# Altium PCB BD658T_AMP_ES4_220615_F.PcbDoc (part 4 of 4)
Units mm, origin at the board's own origin, x right, y up, seen from the top; angles counter-clockwise.
Board outline 153 x 112 mm, 4 copper layers (TOP, LAYER2, LAYER3, BOTTOM), stack 1.59 mm thick; 286 components, 184 nets, 896 pads, 614 vias.
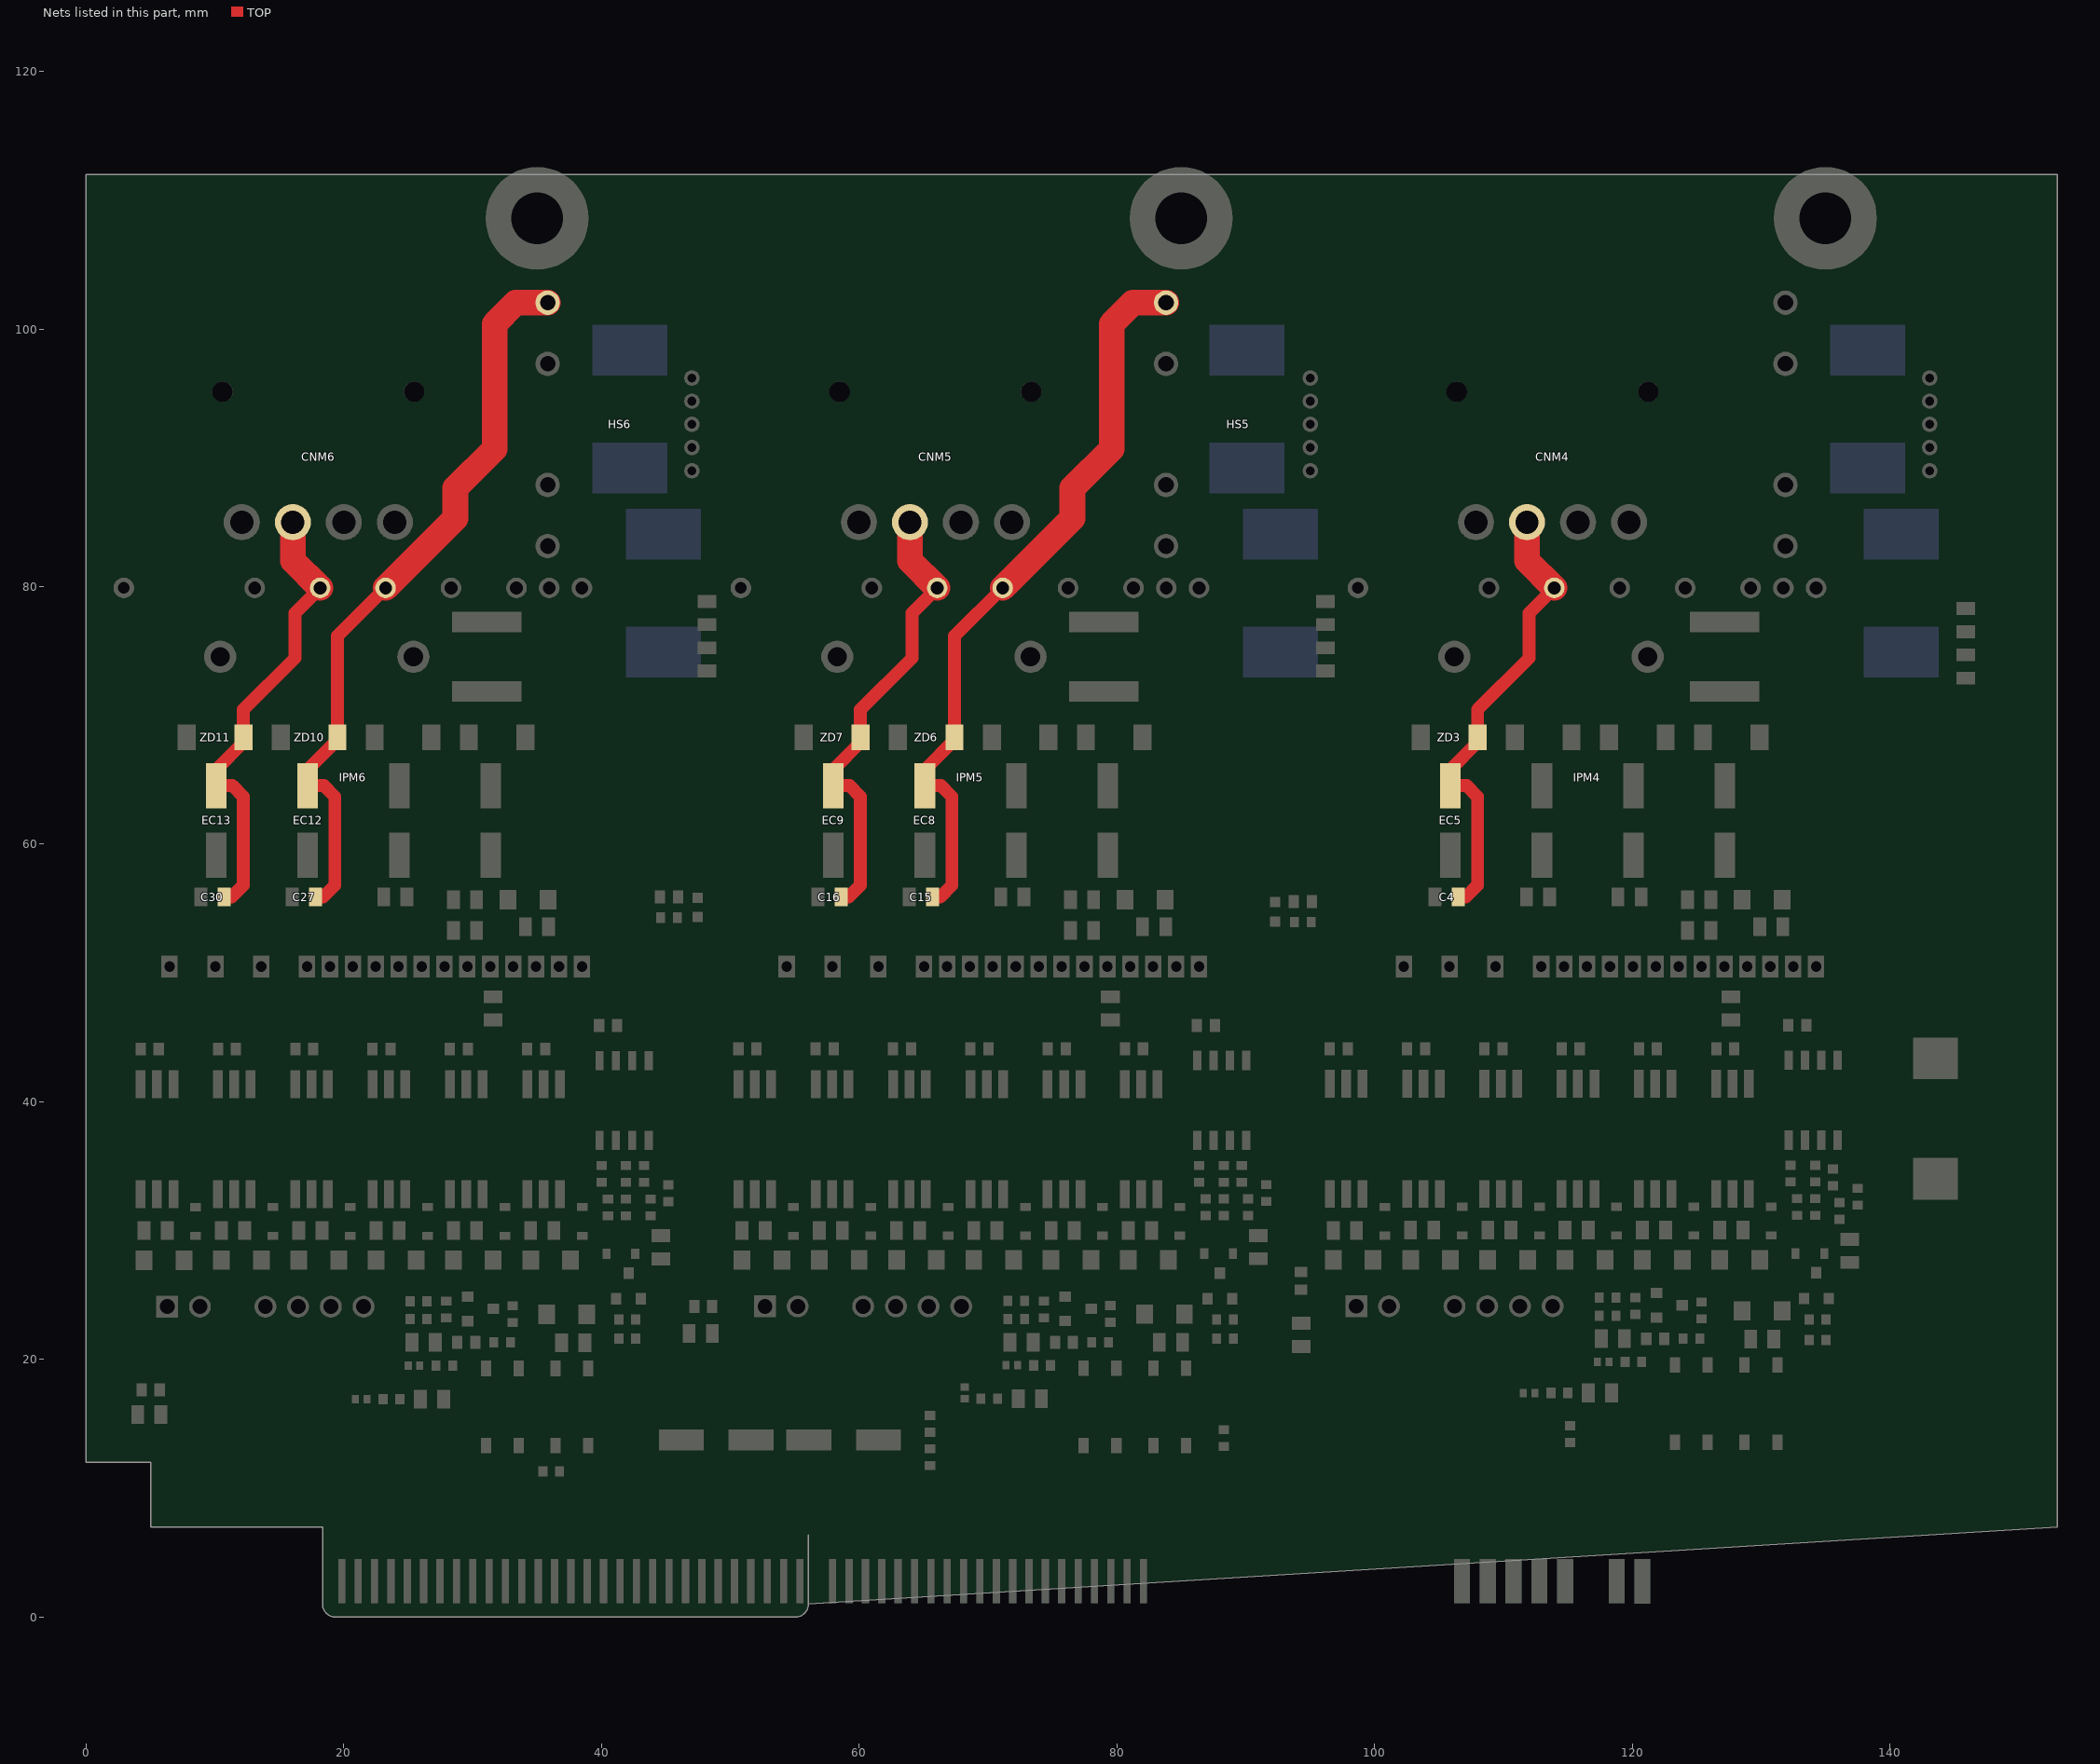
[diagram p6: the nets of this part, all layers, seen from the top]

## Via types
v1: diameter 0.6, hole 0.3, TOP to BOTTOM, 546 vias
v2: diameter 0.4, hole 0.4, TOP to BOTTOM, 56 vias
v3: diameter 6.5, hole 6.5, TOP to BOTTOM, 6 vias
v4: diameter 0.1/0.1/0.1/0.1 (per signal layer), hole 4, TOP to BOTTOM, 4 vias
v5: diameter 4, hole 4, TOP to BOTTOM, 2 vias

## Nets (pads, with @x,y where several pads share a name; then routed paths per layer and width w, separated by ;. In a path a pad name is that pad's centre, name@x,y a point inside that pad or via, vN(x,y) a via of type N, cw(c..) or ccw(c..) an arc to the next point about the centre after c; other vN are vias at no path point) (continued)
VOUT_5: C15.2 EC8.2 HS5.9 IPM5.22 ZD6.2 | length 58
  TOP w1: C15.2@65.7,55.9 66.3,55.9 67.2,56.8 67.2,63.7 66.35,64.55 EC8.2@65.1,64.55 65.1,65.8 67.4,68.1 ZD6.2@67.4,68.3 67.4,76.16 IPM5.22@71.14,79.9
  TOP w2: IPM5.22@71.14,79.9 76.55,85.31 76.55,87.65 79.6,90.7 79.6,100.4 81.25,102.05 HS5.9@83.82,102.05
VOUT_6: C27.2 EC12.2 HS6.9 IPM6.22 ZD10.2 | length 57.9
  TOP w1: C27.2@17.8,55.9 18.4,55.9 19.3,56.8 19.3,63.7 18.45,64.55 EC12.2@17.2,64.55 17.2,65.8 19.5,68.1 ZD10.2@19.5,68.3 19.5,76.16 IPM6.22@23.24,79.9
  TOP w2: IPM6.22@23.24,79.9 28.65,85.31 28.65,87.65 31.7,90.7 31.7,100.4 33.35,102.05 HS6.9@35.82,102.05
W_4: C4.2 CNM4.3 EC5.2 IPM4.23 ZD3.2 | length 35.9
  TOP w1: C4.2@106.5,55.9 107.1,55.9 108,56.8 108,63.7 107.15,64.55 EC5.2@105.9,64.55 105.9,65.8 108,67.9 ZD3.2@108,68.3 108,70.45 112,74.45 112,77.94 IPM4.23@113.96,79.9
  TOP w2: CNM4.3@111.84,85 111.84,82.02 IPM4.23@113.96,79.9
W_5: C16.2 CNM5.3 EC9.2 IPM5.23 ZD7.2 | length 35.9
  TOP w1: C16.2@58.6,55.9 59.2,55.9 60.1,56.8 60.1,63.7 59.25,64.55 EC9.2@58,64.55 58,65.8 60.1,67.9 ZD7.2@60.1,68.3 60.1,70.45 64.1,74.45 64.1,77.94 IPM5.23@66.06,79.9
  TOP w2: CNM5.3@63.94,85 63.94,82.02 IPM5.23@66.06,79.9
W_6: C30.2 CNM6.3 EC13.2 IPM6.23 ZD11.2 | length 35.9
  TOP w1: C30.2@10.7,55.9 11.3,55.9 12.2,56.8 12.2,63.7 11.35,64.55 EC13.2@10.1,64.55 10.1,65.8 12.2,67.9 ZD11.2@12.2,68.3 12.2,70.45 16.2,74.45 16.2,77.94 IPM6.23@18.16,79.9
  TOP w2: CNM6.3@16.04,85 16.04,82.02 IPM6.23@18.16,79.9
pads on no net: CNM4. CNM5. CNM6. CNPN3.09 CNPN3.10 CNPWM4.81 CNPWM4.82 CNPWM4.83 CNPWM4.84 CNPWM4.85 CNPWM4.86 CNPWM4.87 CNPWM4.88 CNPWM4.89 CNPWM4.91 IPM4. IPM4.9 IPM5. IPM5.9 IPM6. IPM6.9 PC1.2 PC2.2 PC4.2 PC5.2 PC6.2 PC7.2 PC10.2 PC11.2 PC13.2 PC14.2 PC15.2 PC16.2 PC19.2 PC20.2 PC22.2 PC23.2 PC24.2 PC25.2
copper on no net:
  other v2: 6.496,7 7.396,7 8.296,7 9.196,7 10.096,7 10.996,7 11.896,7 91.046,7 91.946,7 92.846,7 93.746,7 94.646,7 95.546,7 96.446,7 126.068,7 126.968,7 127.868,7 128.768,7 129.668,7 130.568,7 131.468,7 144.324,7 145.224,7 146.124,7 147.024,7 147.924,7 148.824,7 149.724,7 3.65,112 4.55,112 5.45,112 6.35,112 7.25,112 8.15,112 9.05,112 54.15,112 55.05,112 55.95,112 56.85,112 57.75,112 58.65,112 59.55,112 113.15,112 114.05,112 114.95,112 115.85,112 116.75,112 117.65,112 118.55,112 146.15,112 147.05,112 147.95,112 148.85,112 149.75,112 150.65,112 151.55,112
  other v3: 2.7,65.2 38.7,65.2 50.6,65.2 86.6,65.2 98.5,65.2 134.5,65.2
  other v4: 5,-5 148,-5 5,119 148,119
  other v5: 12.5,13.8 103,13.8

## Polygon pours and split planes (outlines as drawn)
AMP_P15_A4 on TOP "TOP-AMP_P15_A4" (solid, pour order 7): 96.3,25 99.3,25 99.4,24.9 99.4,22.6 99.1,22.3 93.4,22.3 93.1,22.3 92.9,22.5 92.9,25.5 93.2,25.8 93.4,25.8 95.2,25.8 96,25 96.3,25
CVTG_4 on TOP "TOP-CVTG_4" (solid, pour order 16): 82.6,74.65 82.6,74.68 81.48,75.8 76.63,75.8 76.18,76.25 76.18,77.9 76.3,78.02 76.3,78.3 76.55,78.55 84.4,78.55 87.5,75.45 89.05,75.45 89.5,75 89.5,73.5 89.25,73.25 84,73.25 82.6,74.65
CVTG_4 on TOP "TOP-CVTG_4 1" (solid, pour order 15): 34.6,74.65 34.6,74.68 33.48,75.8 28.63,75.8 28.18,76.25 28.18,77.9 28.3,78.02 28.75,78.47 28.75,78.55 36.4,78.55 39.5,75.45 41.05,75.45 41.5,75 41.5,73.5 41.25,73.25 36,73.25 34.6,74.65
AMP_P15_A4 on TOP "TOP-AMP_P15_A4 1" (solid, pour order 10): 7,24.9 7,22.7 4.6,20.3 4.6,15.4 4.2,15 2.1,15 1.9,15.2 1.9,21.1 4.1,23.3 4.1,24.5 4.8,25.2 6.7,25.2 7,24.9
no net on TOP "TOP-No Net" (solid, pour order 41): 152.5,-5.012 152.501,-5.025 152.503,-5.397 152.473,-5.768 152.41,-6.136 152.316,-6.496 152.191,-6.847 152.035,-7.185 151.851,-7.509 151.639,-7.815 151.402,-8.102 151.14,-8.367 150.856,-8.608 150.553,-8.823 150.231,-9.011 149.895,-9.171 149.546,-9.3 149.186,-9.399 148.82,-9.466 148.449,-9.501 148.077,-9.503 148.025,-9.501 148.012,-9.5 5,-9.5 4.608,-9.483 4.219,-9.432 3.835,-9.347 3.461,-9.229 3.098,-9.078 2.75,-8.897 2.419,-8.686 2.107,-8.447 1.818,-8.182 1.553,-7.893 1.314,-7.581 1.103,-7.25 0.922,-6.902 0.771,-6.539 0.653,-6.165 0.568,-5.781 0.517,-5.392 0.5,-5 0.5,4.5 15.846,4.5 15.846,1 15.86,0.695 15.9,0.392 15.966,0.094 16.057,-0.197 16.174,-0.479 16.315,-0.75 16.479,-1.008 16.665,-1.25 16.872,-1.475 17.097,-1.681 17.339,-1.867 17.596,-2.031 17.867,-2.172 18.149,-2.289 18.441,-2.381 18.739,-2.447 19.041,-2.487 19.346,-2.5 82.596,-2.5 82.901,-2.487 83.204,-2.447 83.502,-2.381 83.793,-2.289 84.076,-2.172 84.346,-2.031 84.604,-1.867 84.846,-1.681 85.071,-1.475 85.278,-1.25 85.463,-1.008 85.627,-0.75 85.768,-0.479 85.885,-0.197 85.977,0.094 86.043,0.392 86.083,0.695 86.096,1 86.096,4.5 102.858,4.5 102.858,1 102.872,0.695 102.911,0.392 102.978,0.094 103.069,-0.197 103.186,-0.479 103.327,-0.75 103.491,-1.008 103.677,-1.25 103.883,-1.475 104.109,-1.681 104.351,-1.867 104.608,-2.031 104.879,-2.172 105.161,-2.289 105.452,-2.381 105.751,-2.447 106.053,-2.487 106.358,-2.5 121.298,-2.5 121.603,-2.487 121.906,-2.447 122.204,-2.381 122.495,-2.289 122.777,-2.172 123.048,-2.031 123.306,-1.867 123.548,-1.681 123.773,-1.475 123.979,-1.25 124.165,-1.008 124.329,-0.75 124.47,-0.479 124.587,-0.197 124.679,0.094 124.745,0.392 124.785,0.695 124.798,1 124.798,4.5 152.5,4.5 152.5,-5.012
DC_P3 on TOP "TOP-DC_P3" (solid, pour order 30): 114.3,2 114.3,11.25 114.55,11.5 136.5,11.5 141.05,16.05 141.05,35.35 141.6,35.9 146.1,35.9 146.1,14.05 140.15,8.1 121.4,8.1 121.4,2 118.549,2 118.549,7.23 118.439,7.378 118.317,7.516 118.3,7.533 118.3,8.2 115.4,8.2 115.4,7.632 115.267,7.504 115.146,7.365 115.046,7.23 115.046,2 114.3,2
no net on TOP "TOP-No Net 1" (solid, pour order 39): 152.5,114.5 0.5,114.5 0.5,119 0.517,119.392 0.568,119.781 0.653,120.165 0.771,120.539 0.922,120.902 1.103,121.25 1.314,121.581 1.553,121.893 1.818,122.182 2.107,122.447 2.419,122.686 2.75,122.897 3.098,123.078 3.461,123.229 3.835,123.347 4.219,123.432 4.608,123.483 5,123.5 148,123.5 148.392,123.483 148.781,123.432 149.165,123.347 149.539,123.229 149.902,123.078 150.25,122.897 150.581,122.686 150.893,122.447 151.182,122.182 151.447,121.893 151.686,121.581 151.897,121.25 152.078,120.902 152.229,120.539 152.347,120.165 152.432,119.781 152.483,119.392 152.5,119 152.5,114.5
AMP_P15_A4 on TOP "TOP-AMP_P15_A4 2" (solid, pour order 9): 48.1,25.3 48.1,20.8 48.4,20.5 53.1,20.5 53.6,21 53.6,24.3 53.2,24.7 52.2,24.7 51.5,24.7 51.45,24.75 50.6,25.6 48.4,25.6 48.1,25.3
P_IPM4 on TOP "TOP-P_IPM4" (solid, pour order 8): 33.65,73.3 27.75,73.3 27.45,73 27.45,70.5 27.95,70 33.3,70 33.95,70.65 33.95,73 33.65,73.3
P_IPM4 on TOP "TOP-P_IPM4 1" (solid, pour order 27): 141.05,41.7 141.05,45.8 143.95,48.7 143.95,63.75 142.2,65.5 142.2,68.85 142.65,69.3 146.25,69.3 148.95,66.6 148.95,46.6 146.05,43.7 146.05,42.05 145.7,41.7 141.05,41.7
CVTG_4 on TOP "TOP-CVTG_4 2" (solid, pour order 19): 111.4,9 111.6,9 111.7,9.1 111.7,10.9 111.5,11.1 106.5,11.1 106.3,10.9 106.3,9 106.3,2 111.4,2 111.4,9
P_IPM4 on TOP "TOP-P_IPM4 2" (solid, pour order 6): 75.95,73.3 81.55,73.3 81.85,73 81.85,70.55 81.3,70 76.2,70 75.85,70.35 75.85,73.2 75.95,73.3
AMP_G_A4 on TOP "TOP-AMP_G_A4" (solid, pour order 11): 5,13.5 5,14.3 5,14.8 5.3,15.1 5.3,19.8 7.9,22.4 7.9,24.5 8.1,24.7 9.6,24.7 9.9,24.4 9.9,20.8 8,18.9 8,13.7 7.6,13.3 5.2,13.3 5,13.5
CVTG_4 on TOP "TOP-CVTG_4 3" (solid, pour order 17): 130.85,74.65 130.85,74.68 129.73,75.8 124.88,75.8 124.43,76.25 124.43,77.9 124.55,78.02 124.55,78.3 124.8,78.55 132.65,78.55 135.75,75.45 137.3,75.45 137.75,75 137.75,73.5 137.5,73.25 132.25,73.25 130.85,74.65
AMP_N15_A4 on TOP "TOP-AMP_N15_A4" (solid, pour order 21): 50,12.4 51.3,12.4 51.8,11.9 51.8,9.2 51.6,9 48.8,9 48.6,9.2 48.6,10.1 48.6,10.3 48,10.9 43.75,10.9 42.9,11.75 42.9,16.8 43.9,17.8 48.7,17.8 48.8,17.7 49,17.5 49.2,17.3 49.2,13.2 50,12.4
P_IPM4 on TOP "TOP-P_IPM4 3" (solid, pour order 5): 124.25,73.15 129.75,73.15 130,72.9 130,70.9 129.1,70 124.45,70 124.15,70.3 124.15,73.05 124.25,73.15
AMP_P15_A4 on TOP "TOP-AMP_P15_A4 3" (solid, pour order 20): 53.2,9 56.6,9 58.55,10.95 64.25,10.95 64.7,11.4 64.7,16.4 64.4,16.7 59.25,16.7 59,16.45 59,13.5 58,12.5 53.4,12.5 53,12.1 53,9.2 53.2,9
CVTP15_5 on LAYER3 "LAYER3-CVTP15_5" (solid, pour order 35): 49.4,40.3 49.4,47.4 49.6,47.6 67.686,47.6 68.2,48.114 68.2,52.7 69.7,54.2 73.3,54.2 75.9,56.8 75.9,69.4 76.4,69.9 82.6,69.9 82.9,69.6 82.9,58.3 84.6,56.6 84.6,54.9 85.7,53.8 92.2,53.8 92.7,53.3 92.7,19.6 90.6,17.5 71.7,17.5 67.2,22 60.4,22 59.4,23 59.4,24.314 59.586,24.5 85.2,24.5 85.8,25.1 85.8,38.6 84.1,40.3 49.4,40.3
CVTP15_4 on LAYER3 "LAYER3-CVTP15_4" (solid, pour order 32): 95.3,40.2 95.3,47.4 95.5,47.6 113.6,47.6 114.1,48.1 114.1,52 114.5,52.4 116.8,52.4 119,54.6 122.9,54.6 123.7,55.4 123.7,69.3 124.1,69.7 130.4,69.7 130.7,69.4 130.7,57.6 131.3,57 137,57 137.5,56.5 137.5,46.9 142.1,42.3 142.1,27.9 141.6,27.4 131.8,27.4 131.7,27.5 131.7,38.227 131.7,38.627 130.127,40.2 95.3,40.2
AMP_P15_A4 on LAYER3 "LAYER3-AMP_P15_A4" (solid, pour order 43): 19.001,8 6,8 6,13 1,13 1,34 37.1,34 37.2,33.9 37.2,27.1 36.8,26.7 11.8,26.7 10.5,25.4 10.5,22 12.9,19.6 19.6,19.6 23.9,15.3 45.9,15.3 47.9,17.3 47.9,32.3 49.4,33.8 49.6,34 83.5,34 83.6,33.9 83.6,27.1 83.2,26.7 58.2,26.7 56.9,25.4 56.9,22 59.3,19.6 66,19.6 70.3,15.3 91.6,15.3 94,17.7 94,32.6 95.3,33.9 95.4,34 129.4,34 129.5,33.9 129.5,27.1 129.1,26.7 104,26.7 102.8,25.5 102.8,22 105.8,19 108,16.8 108,12.1 106.3,10.4 105.8,9.9 105.8,8 83.096,8 19.001,8
P_IPM4 on LAYER3 "LAYER3-P_IPM4" (solid, pour order 3): 145.8,47.55 143.1,47.55 142.95,47.4 142.95,45.5 143.1,45.35 145.8,45.35 145.95,45.5 145.95,47.4 145.8,47.55
CVTP15_6 on LAYER3 "LAYER3-CVTP15_6" (solid, pour order 36): 3,40.3 3,47.6 21.3,47.6 21.8,48.1 21.8,52.7 23.3,54.2 25.3,54.2 27.9,56.8 27.9,69.1 28.3,69.5 34.8,69.5 35,69.3 35,59.7 35,59.4 38,56.4 38,54.7 39.1,53.6 43.7,53.6 45.2,53.6 46.3,52.5 46.3,36.643 46.3,19.6 44.2,17.5 25.25,17.5 20.75,22 14,22 13,23 13,24.3 13.2,24.5 30,24.5 38.8,24.5 39.4,25.1 39.4,38.2 39.4,38.6 37.7,40.3 3,40.3
DC_P3 on LAYER3 "LAYER3-DC_P3" (solid, pour order 0): 145.85,32.1 144.75,32.1 144.6,31.95 144.6,27.85 144.75,27.7 145.85,27.7 146,27.85 146,31.95 145.85,32.1
DC_P3 on BOTTOM "BOTTOM-DC_P3" (solid, pour order 18): 114.3,2 114.3,10.8 114.6,11.1 121.3,11.1 121.5,10.9 121.5,9.1 121.4,9 121.4,2 118.549,2 118.549,7.23 118.439,7.378 118.317,7.516 118.3,7.533 118.3,8.2 115.4,8.2 115.4,7.632 115.267,7.504 115.146,7.365 115.046,7.23 115.046,2 114.3,2
no net on BOTTOM "BOTTOM-No Net" (solid, pour order 42): 152.5,-5.012 152.501,-5.025 152.503,-5.397 152.473,-5.768 152.41,-6.136 152.316,-6.496 152.191,-6.847 152.035,-7.185 151.851,-7.509 151.639,-7.815 151.402,-8.102 151.14,-8.367 150.856,-8.608 150.553,-8.823 150.231,-9.011 149.895,-9.171 149.546,-9.3 149.186,-9.399 148.82,-9.466 148.449,-9.501 148.077,-9.503 148.025,-9.501 148.012,-9.5 5,-9.5 4.608,-9.483 4.219,-9.432 3.835,-9.347 3.461,-9.229 3.098,-9.078 2.75,-8.897 2.419,-8.686 2.107,-8.447 1.818,-8.182 1.553,-7.893 1.314,-7.581 1.103,-7.25 0.922,-6.902 0.771,-6.539 0.653,-6.165 0.568,-5.781 0.517,-5.392 0.5,-5 0.5,4.5 15.846,4.5 15.846,1 15.86,0.695 15.9,0.392 15.966,0.094 16.057,-0.197 16.174,-0.479 16.315,-0.75 16.479,-1.008 16.665,-1.25 16.872,-1.475 17.097,-1.681 17.339,-1.867 17.596,-2.031 17.867,-2.172 18.149,-2.289 18.441,-2.381 18.739,-2.447 19.041,-2.487 19.346,-2.5 82.596,-2.5 82.901,-2.487 83.204,-2.447 83.502,-2.381 83.793,-2.289 84.076,-2.172 84.346,-2.031 84.604,-1.867 84.846,-1.681 85.071,-1.475 85.278,-1.25 85.463,-1.008 85.627,-0.75 85.768,-0.479 85.885,-0.197 85.977,0.094 86.043,0.392 86.083,0.695 86.096,1 86.096,4.5 102.858,4.5 102.858,1 102.872,0.695 102.911,0.392 102.978,0.094 103.069,-0.197 103.186,-0.479 103.327,-0.75 103.491,-1.008 103.677,-1.25 103.883,-1.475 104.109,-1.681 104.351,-1.867 104.608,-2.031 104.879,-2.172 105.161,-2.289 105.452,-2.381 105.751,-2.447 106.053,-2.487 106.358,-2.5 121.298,-2.5 121.603,-2.487 121.906,-2.447 122.204,-2.381 122.495,-2.289 122.777,-2.172 123.048,-2.031 123.306,-1.867 123.548,-1.681 123.773,-1.475 123.979,-1.25 124.165,-1.008 124.329,-0.75 124.47,-0.479 124.587,-0.197 124.679,0.094 124.745,0.392 124.785,0.695 124.798,1 124.798,4.5 152.5,4.5 152.5,-5.012
N407898 on BOTTOM "BOTTOM-N407898" (solid, pour order 24): 47.7,79.1 47.7,86.7 45.8,88.6 45.8,89.1 45.8,90.9 45.3,91.4 39,91.4 38.8,91.2 38.8,88.8 38.8,82 37.2,80.4 33.1,80.4 32.9,80.2 32.9,77.9 34,76.8 39.2,76.8 41.2,78.8 41.3,78.9 47.5,78.9 47.7,79.1
no net on BOTTOM "BOTTOM-No Net 1" (solid, pour order 40): 152.5,114.5 0.5,114.5 0.5,119 0.517,119.392 0.568,119.781 0.653,120.165 0.771,120.539 0.922,120.902 1.103,121.25 1.314,121.581 1.553,121.893 1.818,122.182 2.107,122.447 2.419,122.686 2.75,122.897 3.098,123.078 3.461,123.229 3.835,123.347 4.219,123.432 4.608,123.483 5,123.5 148,123.5 148.392,123.483 148.781,123.432 149.165,123.347 149.539,123.229 149.902,123.078 150.25,122.897 150.581,122.686 150.893,122.447 151.182,122.182 151.447,121.893 151.686,121.581 151.897,121.25 152.078,120.902 152.229,120.539 152.347,120.165 152.432,119.781 152.483,119.392 152.5,119 152.5,114.5
P_IPM4 on BOTTOM "BOTTOM-P_IPM4" (solid, pour order 4): 144.4,68.7 144.7,68.7 144.8,68.6 144.8,65.9 144.6,65.7 142.5,65.7 141.8,65.7 140.3,67.2 140.3,68.1 140.9,68.7 142.3,68.7 144.4,68.7
DC_P3 on BOTTOM "BOTTOM-DC_P3 1" (solid, pour order 1): 145.85,27.7 144.75,27.7 144.6,27.85 144.6,31.95 144.75,32.1 145.85,32.1 146,31.95 146,27.85 145.85,27.7
CVTG_4 on BOTTOM "BOTTOM-CVTG_4" (solid, pour order 14): 44.92,96.4 39.32,96.4 39.22,96.5 39.22,102 39.62,102.4 44.72,102.4 45.12,102 45.12,96.6 44.92,96.4
CVTG_4 on BOTTOM "BOTTOM-CVTG_4 1" (solid, pour order 13): 92.82,96.4 87.22,96.4 87.12,96.5 87.12,102 87.52,102.4 92.62,102.4 93.02,102 93.02,96.6 92.82,96.4
CVTG_4 on BOTTOM "BOTTOM-CVTG_4 2" (solid, pour order 23): 47.5,76.8 42,76.8 40,74.8 31.4,74.8 30.6,75.6 27.2,75.6 24.9,75.6 24.3,75 24.3,73.7 25,73 27.4,73 47.7,73 47.8,73.1 47.8,76.5 47.5,76.8
N317023 on BOTTOM "BOTTOM-N317023" (solid, pour order 26): 95.6,79.1 95.6,86.7 93.7,88.6 93.7,89.1 93.7,90.9 93.2,91.4 86.9,91.4 86.7,91.2 86.7,88.8 86.7,82 85.1,80.4 81,80.4 80.8,80.2 80.8,77.9 81.9,76.8 87.1,76.8 89.1,78.8 89.2,78.9 95.4,78.9 95.6,79.1
CVTG_4 on BOTTOM "BOTTOM-CVTG_4 3" (solid, pour order 31): 113.75,14.7 111.7,12.65 111.7,9.1 111.4,8.8 111.4,2 106.3,2 106.3,11.1 107.6,12.4 107.6,15.4 111.4,19.2 114.85,19.207 116.243,20.6 146.8,20.6 148,21.8 148,68.2 145.5,70.7 142.5,70.7 140.2,73 121.3,73 120.5,73.8 120.5,75 121.1,75.6 126.7,75.6 127.5,74.8 136.08,74.8 138.78,77.5 150.4,77.5 152,75.9 152,17 149.7,14.7 113.75,14.7
CVTG_4 on BOTTOM "BOTTOM-CVTG_4 4" (solid, pour order 22): 75.1,75.6 78.5,75.6 79.3,74.8 87.9,74.8 89.9,76.8 95.4,76.8 95.7,76.5 95.7,73.1 95.6,73 75.3,73 73.2,73 72.3,73.9 72.3,75 72.9,75.6 75.1,75.6
CVTG_4 on BOTTOM "BOTTOM-CVTG_4 5" (solid, pour order 12): 141,96.4 135.4,96.4 135.3,96.5 135.3,102 135.7,102.4 140.8,102.4 141.2,102 141.2,96.6 141,96.4
N298018 on BOTTOM "BOTTOM-N298018" (solid, pour order 25): 143.78,79.1 143.78,86.7 141.88,88.6 141.88,89.1 141.88,90.9 141.38,91.4 135.08,91.4 134.88,91.2 134.88,88.8 134.88,82 133.28,80.4 129.18,80.4 128.98,80.2 128.98,77.9 130.08,76.8 135.28,76.8 137.28,78.8 137.38,78.9 143.58,78.9 143.78,79.1
P_IPM4 on BOTTOM "BOTTOM-P_IPM4 1" (solid, pour order 2): 145.8,47.55 143.1,47.55 142.95,47.4 142.95,45.55 143.15,45.35 145.8,45.35 145.95,45.5 145.95,47.4 145.8,47.55
DC_P3 on LAYER2 "LAYER2-DC_P3" (solid, pour order 29): 114.292,2.019 114.3,11.25 114.55,11.5 136.5,11.5 137.619,12.619 137.592,12.619 141.042,16.069 141.042,35.369 141.591,35.919 146.092,35.919 146.092,14.069 140.142,8.119 121.391,8.119 121.391,2.019 118.541,2.019 118.541,7.248 118.431,7.397 118.309,7.535 118.292,7.552 118.292,8.219 115.391,8.219 115.391,7.651 115.259,7.523 115.137,7.384 115.038,7.248 115.038,2.019 114.292,2.019
CVTG_4 on LAYER2 "LAYER2-CVTG_4" (solid, pour order 34): 71.7,17.5 67.2,22 60.4,22 59.4,23 59.4,24.3 59.6,24.5 85.2,24.5 85.8,25.1 85.8,38.6 84.1,40.3 49.7,40.3 49.4,40.6 49.4,47.4 49.6,47.6 67.7,47.6 68.2,48.1 68.2,52.7 69.7,54.2 73.3,54.2 75.9,56.8 75.9,69.4 76.4,69.9 82.6,69.9 82.9,69.6 82.9,58.3 84.6,56.6 84.6,54.9 85.7,53.8 92.2,53.8 92.7,53.3 92.7,39.1 92.7,19.6 90.6,17.5 71.7,17.5
P_IPM4 on LAYER2 "LAYER2-P_IPM4" (solid, pour order 28): 141.049,41.712 141.049,45.812 143.949,48.712 143.949,63.762 142.199,65.512 142.199,68.862 142.649,69.312 146.249,69.312 148.949,66.612 148.949,46.612 146.049,43.712 146.049,42.062 145.7,41.712 141.049,41.712
CVTG_4 on LAYER2 "LAYER2-CVTG_4 1" (solid, pour order 33): 107.25,21.05 105.3,23 105.3,24.3 105.5,24.5 131.1,24.5 131.7,25.1 131.7,38.6 130.1,40.2 95.3,40.2 95.3,47.4 95.5,47.6 113.6,47.6 114.1,48.1 114.1,52 114.5,52.4 116.8,52.4 119,54.6 122.9,54.6 123.7,55.4 123.7,69.3 124.1,69.7 130.4,69.7 130.7,69.4 130.7,57.6 131.3,57 137,57 137.5,56.5 137.5,46.9 139.5,44.9 139.5,23.4 137.15,21.05 107.25,21.05
AMP_G_A4 on LAYER2 "LAYER2-AMP_G_A4" (solid, pour order 44): 19.001,8 6,8 6,13 1,13 1,33.7 1.3,34 37.1,34 37.2,33.9 37.2,27.1 36.8,26.7 11.8,26.7 10.5,25.4 10.5,22 12.9,19.6 19.6,19.6 23.9,15.3 45.9,15.3 47.4,16.8 47.9,17.3 47.9,32.3 49.4,33.8 49.6,34 83.5,34 83.6,33.9 83.6,27.1 83.2,26.7 58.2,26.7 56.9,25.4 56.9,22 59.3,19.6 66,19.6 70.3,15.3 91.6,15.3 93.3,17 94,17.7 94,32.6 95.3,33.9 95.4,34 129.4,34 129.5,33.9 129.5,27.1 129.1,26.7 104,26.7 102.8,25.5 102.8,22 107.6,17.2 134.5,17.2 139.1,21.8 139.4,21.8 139.5,21.7 139.5,19.4 133,12.9 108,12.9 105.8,10.7 105.8,8 83.096,8 19.001,8
CVTG_4 on LAYER2 "LAYER2-CVTG_4 2" (solid, pour order 37): 25.3,17.5 20.8,22 14,22 13,23 13,24.3 13.2,24.5 38.8,24.5 39.4,25.1 39.4,38.6 37.7,40.3 3,40.3 3,47.3 3.3,47.6 21.3,47.6 21.8,48.1 21.8,52.7 23.3,54.2 25.3,54.2 27.9,56.8 27.9,69.65 28.15,69.9 34.7,69.9 35,69.6 35,59.4 38,56.4 38,54.7 39.1,53.6 43.7,53.6 45.2,53.6 46.3,52.5 46.3,51 46.3,39.7 46.3,19.6 44.2,17.5 25.3,17.5
CVTG_4 on LAYER2 "LAYER2-CVTG_4 3" (solid, pour order 38): 31.1,73 30.9,73.2 30.9,77.5 31.5,78.1 38.3,78.1 38.8,78.6 38.8,101.6 39.6,102.4 47,102.4 47.8,101.6 47.8,78.9 48.6,78.1 86.2,78.1 86.8,78.7 86.8,101.6 87.6,102.4 95,102.4 95.8,101.6 95.8,78.7 96.4,78.1 134.5,78.1 134.88,78.48 134.88,101.6 135.68,102.4 143.08,102.4 143.88,101.6 143.88,73.3 143.58,73 31.1,73

## Keep-outs
Multi-Layer:
  drawing of 25 lines, arcs and shapes, not listed

## Other copper
TOP:
  pour cut-out: 144.608,-5 144.577,-4.686 144.486,-4.385 144.337,-4.107 144.137,-3.863 143.893,-3.663 143.615,-3.514 143.314,-3.423 143,-3.392 142.686,-3.423 142.385,-3.514 142.199,-3.613 142.107,-3.663 141.863,-3.863 141.663,-4.107 141.514,-4.385 141.423,-4.686 141.392,-5 141.423,-5.314 141.514,-5.615 141.663,-5.893 141.863,-6.137 142.107,-6.337 142.199,-6.387 142.385,-6.486 142.686,-6.577 143,-6.608 143.314,-6.577 143.615,-6.486 143.893,-6.337 144.137,-6.137 144.337,-5.893 144.486,-5.615 144.577,-5.314 144.608,-5
  pour cut-out: 11.608,-5 11.577,-4.686 11.486,-4.385 11.337,-4.107 11.137,-3.863 10.893,-3.663 10.615,-3.514 10.314,-3.423 10,-3.392 9.686,-3.423 9.385,-3.514 9.199,-3.613 9.107,-3.663 8.863,-3.863 8.663,-4.107 8.514,-4.385 8.423,-4.686 8.392,-5 8.423,-5.314 8.514,-5.615 8.663,-5.893 8.863,-6.137 9.107,-6.337 9.199,-6.387 9.385,-6.486 9.686,-6.577 10,-6.608 10.314,-6.577 10.615,-6.486 10.893,-6.337 11.137,-6.137 11.337,-5.893 11.486,-5.615 11.577,-5.314 11.608,-5
  pour cut-out net AMP_N15_A4: 44.25,14.75 48.15,14.75 48.15,12.75 44.25,12.75 44.25,14.75
  pour cut-out net AMP_P15_A4: 59.55,14.75 63.45,14.75 63.45,12.75 59.55,12.75 59.55,14.75
  pour cut-out: 144.608,119 144.577,119.314 144.486,119.615 144.337,119.893 144.137,120.137 143.893,120.337 143.615,120.486 143.314,120.577 143,120.608 142.686,120.577 142.385,120.486 142.199,120.387 142.107,120.337 141.863,120.137 141.663,119.893 141.514,119.615 141.423,119.314 141.392,119 141.423,118.686 141.514,118.385 141.663,118.107 141.863,117.863 142.107,117.663 142.199,117.613 142.385,117.514 142.686,117.423 143,117.392 143.314,117.423 143.615,117.514 143.893,117.663 144.137,117.863 144.337,118.107 144.486,118.385 144.577,118.686 144.608,119
  pour cut-out: 11.608,119 11.577,119.314 11.486,119.615 11.337,119.893 11.137,120.137 10.893,120.337 10.615,120.486 10.314,120.577 10,120.608 9.686,120.577 9.385,120.486 9.199,120.387 9.107,120.337 8.863,120.137 8.663,119.893 8.514,119.615 8.423,119.314 8.392,119 8.423,118.686 8.514,118.385 8.663,118.107 8.863,117.863 9.107,117.663 9.199,117.613 9.385,117.514 9.686,117.423 10,117.392 10.314,117.423 10.615,117.514 10.893,117.663 11.137,117.863 11.337,118.107 11.486,118.385 11.577,118.686 11.608,119
  text "TOP" at 20.8,-24.6 h1.5
LAYER2:
  pour cut-out net CVTG_4: 131.667,51.535 133.337,51.535 133.337,49.465 131.667,49.465 131.667,51.535
  pour cut-out net CVTG_4: 133.445,51.535 135.115,51.535 135.115,49.465 133.445,49.465 133.445,51.535
  pour cut-out net CVTG_4: 115.665,51.535 117.335,51.535 117.335,49.465 115.665,49.465 115.665,51.535
  pour cut-out net CVTG_4: 117.443,51.535 119.113,51.535 119.113,49.465 117.443,49.465 117.443,51.535
  pour cut-out net CVTG_4: 119.221,51.535 120.891,51.535 120.891,49.465 119.221,49.465 119.221,51.535
  pour cut-out net CVTG_4: 120.999,51.535 122.669,51.535 122.669,49.465 120.999,49.465 120.999,51.535
  pour cut-out net CVTG_4: 122.777,51.535 124.447,51.535 124.447,49.465 122.777,49.465 122.777,51.535
  pour cut-out net CVTG_4: 124.555,51.535 126.225,51.535 126.225,49.465 124.555,49.465 124.555,51.535
  pour cut-out net CVTG_4: 126.333,51.535 128.003,51.535 128.003,49.465 126.333,49.465 126.333,51.535
  pour cut-out net CVTG_4: 128.111,51.535 129.781,51.535 129.781,49.465 128.111,49.465 128.111,51.535
  pour cut-out net CVTG_4: 129.889,51.535 131.559,51.535 131.559,49.465 129.889,49.465 129.889,51.535
  pour cut-out net AMP_G_A4: 97.54,25.177 99.64,25.177 99.64,23.077 97.54,23.077 97.54,25.177
  pour cut-out net AMP_G_A4: 102.189,24.127 102.153,24.401 102.047,24.657 101.879,24.876 101.659,25.045 101.404,25.15 101.13,25.186 100.856,25.15 100.6,25.045 100.381,24.876 100.212,24.657 100.107,24.401 100.07,24.127 100.107,23.853 100.212,23.598 100.381,23.378 100.6,23.21 100.856,23.104 101.13,23.068 101.404,23.104 101.659,23.21 101.879,23.378 102.047,23.598 102.153,23.853 102.189,24.127
  pour cut-out net AMP_G_A4: 51.64,25.164 53.74,25.164 53.74,23.063 51.64,23.063 51.64,25.164
  pour cut-out net AMP_G_A4: 56.289,24.114 56.253,24.388 56.147,24.643 55.979,24.863 55.76,25.031 55.504,25.137 55.23,25.173 54.956,25.137 54.7,25.031 54.481,24.863 54.313,24.643 54.207,24.388 54.171,24.114 54.207,23.839 54.313,23.584 54.481,23.365 54.7,23.196 54.956,23.09 55.23,23.054 55.504,23.09 55.76,23.196 55.979,23.365 56.147,23.584 56.253,23.839 56.289,24.114
  pour cut-out net AMP_G_A4: 5.24,25.15 7.34,25.15 7.34,23.05 5.24,23.05 5.24,25.15
  pour cut-out net AMP_G_A4: 9.889,24.1 9.853,24.374 9.747,24.63 9.579,24.849 9.36,25.017 9.104,25.123 8.83,25.159 8.556,25.123 8.3,25.017 8.081,24.849 7.913,24.63 7.807,24.374 7.771,24.1 7.807,23.826 7.913,23.57 8.081,23.351 8.3,23.183 8.556,23.077 8.83,23.041 9.104,23.077 9.36,23.183 9.579,23.351 9.747,23.57 9.853,23.826 9.889,24.1
  pour cut-out net CVTG_4: 25.199,51.535 26.869,51.535 26.869,49.465 25.199,49.465 25.199,51.535
  pour cut-out net CVTG_4: 26.977,51.535 28.647,51.535 28.647,49.465 26.977,49.465 26.977,51.535
  pour cut-out net CVTG_4: 28.755,51.535 30.425,51.535 30.425,49.465 28.755,49.465 28.755,51.535
  pour cut-out net CVTG_4: 30.533,51.535 32.203,51.535 32.203,49.465 30.533,49.465 30.533,51.535
  pour cut-out net CVTG_4: 32.311,51.535 33.981,51.535 33.981,49.465 32.311,49.465 32.311,51.535
  pour cut-out net CVTG_4: 34.089,51.535 35.759,51.535 35.759,49.465 34.089,49.465 34.089,51.535
  pour cut-out net CVTG_4: 35.867,51.535 37.537,51.535 37.537,49.465 35.867,49.465 35.867,51.535
  pour cut-out net CVTG_4: 37.645,51.535 39.315,51.535 39.315,49.465 37.645,49.465 37.645,51.535
  pour cut-out net CVTG_4: 23.421,51.535 25.091,51.535 25.091,49.465 23.421,49.465 23.421,51.535
  pour cut-out net CVTG_4: 78.433,51.535 80.103,51.535 80.103,49.465 78.433,49.465 78.433,51.535
  pour cut-out net CVTG_4: 80.211,51.535 81.881,51.535 81.881,49.465 80.211,49.465 80.211,51.535
  pour cut-out net CVTG_4: 81.989,51.535 83.659,51.535 83.659,49.465 81.989,49.465 81.989,51.535
  pour cut-out net CVTG_4: 83.767,51.535 85.437,51.535 85.437,49.465 83.767,49.465 83.767,51.535
  pour cut-out net CVTG_4: 85.545,51.535 87.215,51.535 87.215,49.465 85.545,49.465 85.545,51.535
  pour cut-out net CVTG_4: 69.543,51.535 71.213,51.535 71.213,49.465 69.543,49.465 69.543,51.535
  pour cut-out net CVTG_4: 71.321,51.535 72.991,51.535 72.991,49.465 71.321,49.465 71.321,51.535
  pour cut-out net CVTG_4: 73.099,51.535 74.769,51.535 74.769,49.465 73.099,49.465 73.099,51.535
  pour cut-out net CVTG_4: 74.877,51.535 76.547,51.535 76.547,49.465 74.877,49.465 74.877,51.535
  pour cut-out net CVTG_4: 76.655,51.535 78.325,51.535 78.325,49.465 76.655,49.465 76.655,51.535
  text "LAYER2" at 20.8,-24.6 h1.5
  text "LAYER2" at 20.85,-24.6 h1.5
LAYER3:
  pour cut-out net CVTP15_6: 25.199,51.535 26.869,51.535 26.869,49.465 25.199,49.465 25.199,51.535
  pour cut-out net CVTP15_6: 26.977,51.535 28.647,51.535 28.647,49.465 26.977,49.465 26.977,51.535
  pour cut-out net CVTP15_6: 28.755,51.535 30.425,51.535 30.425,49.465 28.755,49.465 28.755,51.535
  pour cut-out net CVTP15_6: 30.533,51.535 32.203,51.535 32.203,49.465 30.533,49.465 30.533,51.535
  pour cut-out net CVTP15_6: 32.311,51.535 33.981,51.535 33.981,49.465 32.311,49.465 32.311,51.535
  pour cut-out net CVTP15_6: 34.089,51.535 35.759,51.535 35.759,49.465 34.089,49.465 34.089,51.535
  pour cut-out net CVTP15_6: 35.867,51.535 37.537,51.535 37.537,49.465 35.867,49.465 35.867,51.535
  pour cut-out net CVTP15_6: 37.645,51.535 39.315,51.535 39.315,49.465 37.645,49.465 37.645,51.535
  pour cut-out net CVTP15_6: 23.421,51.535 25.091,51.535 25.091,49.465 23.421,49.465 23.421,51.535
  pour cut-out net AMP_P15_A4: 97.54,25.177 99.64,25.177 99.64,23.077 97.54,23.077 97.54,25.177
  pour cut-out net AMP_P15_A4: 102.189,24.127 102.153,24.401 102.047,24.657 101.879,24.876 101.659,25.045 101.404,25.15 101.13,25.186 100.856,25.15 100.6,25.045 100.381,24.876 100.212,24.657 100.107,24.401 100.07,24.127 100.107,23.853 100.212,23.598 100.381,23.378 100.6,23.21 100.856,23.104 101.13,23.068 101.404,23.104 101.659,23.21 101.879,23.378 102.047,23.598 102.153,23.853 102.189,24.127
  pour cut-out net AMP_P15_A4: 51.64,25.164 53.74,25.164 53.74,23.063 51.64,23.063 51.64,25.164
  pour cut-out net AMP_P15_A4: 56.289,24.114 56.253,24.388 56.147,24.643 55.979,24.863 55.76,25.031 55.504,25.137 55.23,25.173 54.956,25.137 54.7,25.031 54.481,24.863 54.313,24.643 54.207,24.388 54.171,24.114 54.207,23.839 54.313,23.584 54.481,23.365 54.7,23.196 54.956,23.09 55.23,23.054 55.504,23.09 55.76,23.196 55.979,23.365 56.147,23.584 56.253,23.839 56.289,24.114
  pour cut-out net AMP_P15_A4: 5.24,25.15 7.34,25.15 7.34,23.05 5.24,23.05 5.24,25.15
  pour cut-out net AMP_P15_A4: 9.889,24.1 9.853,24.374 9.747,24.63 9.579,24.849 9.36,25.017 9.104,25.123 8.83,25.159 8.556,25.123 8.3,25.017 8.081,24.849 7.913,24.63 7.807,24.374 7.771,24.1 7.807,23.826 7.913,23.57 8.081,23.351 8.3,23.183 8.556,23.077 8.83,23.041 9.104,23.077 9.36,23.183 9.579,23.351 9.747,23.57 9.853,23.826 9.889,24.1
  pour cut-out net CVTP15_4: 131.667,51.535 133.337,51.535 133.337,49.465 131.667,49.465 131.667,51.535
  pour cut-out net CVTP15_4: 133.445,51.535 135.115,51.535 135.115,49.465 133.445,49.465 133.445,51.535
  pour cut-out net CVTP15_4: 115.665,51.535 117.335,51.535 117.335,49.465 115.665,49.465 115.665,51.535
  pour cut-out net CVTP15_4: 117.443,51.535 119.113,51.535 119.113,49.465 117.443,49.465 117.443,51.535
  pour cut-out net CVTP15_4: 119.221,51.535 120.891,51.535 120.891,49.465 119.221,49.465 119.221,51.535
  pour cut-out net CVTP15_4: 120.999,51.535 122.669,51.535 122.669,49.465 120.999,49.465 120.999,51.535
  pour cut-out net CVTP15_4: 122.777,51.535 124.447,51.535 124.447,49.465 122.777,49.465 122.777,51.535
  pour cut-out net CVTP15_4: 124.555,51.535 126.225,51.535 126.225,49.465 124.555,49.465 124.555,51.535
  pour cut-out net CVTP15_4: 126.333,51.535 128.003,51.535 128.003,49.465 126.333,49.465 126.333,51.535
  pour cut-out net CVTP15_4: 128.111,51.535 129.781,51.535 129.781,49.465 128.111,49.465 128.111,51.535
  pour cut-out net CVTP15_4: 129.889,51.535 131.559,51.535 131.559,49.465 129.889,49.465 129.889,51.535
  pour cut-out net CVTP15_5: 78.433,51.535 80.103,51.535 80.103,49.465 78.433,49.465 78.433,51.535
  pour cut-out net CVTP15_5: 80.211,51.535 81.881,51.535 81.881,49.465 80.211,49.465 80.211,51.535
  pour cut-out net CVTP15_5: 81.989,51.535 83.659,51.535 83.659,49.465 81.989,49.465 81.989,51.535
  pour cut-out net CVTP15_5: 83.767,51.535 85.437,51.535 85.437,49.465 83.767,49.465 83.767,51.535
  pour cut-out net CVTP15_5: 85.545,51.535 87.215,51.535 87.215,49.465 85.545,49.465 85.545,51.535
  pour cut-out net CVTP15_5: 69.543,51.535 71.213,51.535 71.213,49.465 69.543,49.465 69.543,51.535
  pour cut-out net CVTP15_5: 71.321,51.535 72.991,51.535 72.991,49.465 71.321,49.465 71.321,51.535
  pour cut-out net CVTP15_5: 73.099,51.535 74.769,51.535 74.769,49.465 73.099,49.465 73.099,51.535
  pour cut-out net CVTP15_5: 74.877,51.535 76.547,51.535 76.547,49.465 74.877,49.465 74.877,51.535
  pour cut-out net CVTP15_5: 76.655,51.535 78.325,51.535 78.325,49.465 76.655,49.465 76.655,51.535
  pour cut-out: 142.1,36.681 142.1,34.119 142.099,34.11 142.097,34.101 142.095,34.093 142.091,34.085 142.088,34.077 142.083,34.069 142.078,34.062 142.072,34.055 142.066,34.049 142.059,34.044 142.051,34.039 142.044,34.034 142.035,34.031 142.027,34.028 142.018,34.026 142.01,34.024 142.001,34.024 141.992,34.024 141.983,34.025 141.974,34.027 141.966,34.029 141.958,34.032 141.95,34.036 141.942,34.041 141.935,34.046 141.928,34.052 141.927,34.053 140.91,35.07 140.91,37.625 140.911,37.634 140.912,37.643 140.914,37.651 140.916,37.66 140.92,37.668 140.924,37.676 140.929,37.683 140.934,37.69 140.94,37.697 140.946,37.703 140.954,37.708 140.961,37.713 140.969,37.717 140.977,37.721 140.986,37.723 140.994,37.725 141.003,37.726 141.012,37.727 141.021,37.726 141.029,37.725 141.038,37.723 141.047,37.721 141.055,37.717 141.063,37.713 141.07,37.708 141.077,37.703 141.084,37.697 142.1,36.681
  pour cut-out: 95,19.015 94.173,18.188 94.167,18.182 94.16,18.177 94.152,18.172 94.144,18.168 94.136,18.164 94.128,18.162 94.119,18.16 94.11,18.159 94.102,18.158 94.093,18.159 94.084,18.16 94.075,18.162 94.067,18.164 94.059,18.168 94.051,18.172 94.043,18.177 94.036,18.182 94.03,18.188 94.024,18.195 94.018,18.202 94.014,18.209 94.009,18.217 94.006,18.225 94.003,18.234 94.002,18.242 94,18.251 94,18.253 94,30.179 94.001,30.188 94.003,30.197 94.005,30.205 94.009,30.214 94.012,30.222 94.017,30.229 94.022,30.236 94.028,30.243 94.034,30.249 94.041,30.255 94.049,30.26 94.056,30.264 94.065,30.268 94.073,30.27 94.082,30.272 94.09,30.274 94.099,30.274 94.108,30.274 94.117,30.273 94.126,30.272 94.134,30.269 94.138,30.268 94.221,30.24 94.306,30.219 94.392,30.206 94.479,30.2 94.566,30.202 94.653,30.212 94.739,30.229 94.822,30.253 94.862,30.267 94.87,30.27 94.879,30.272 94.888,30.274 94.896,30.274 94.905,30.274 94.914,30.273 94.923,30.271 94.931,30.269 94.94,30.266 94.947,30.262 94.955,30.257 94.962,30.252 94.969,30.246 94.975,30.24 94.981,30.233 94.985,30.225 94.99,30.218 94.993,30.209 94.996,30.201 94.998,30.192 95,30.184 95,30.175 95,30.173 95,19.015
  text "LAYER3" at 20.8,-24.6 h1.5
  text "LAYER3" at 20.85,-24.6 h1.5
BOTTOM:
  pour cut-out net N317023: 87.389,79.9 87.354,80.161 87.254,80.404 87.093,80.613 86.884,80.774 86.641,80.874 86.38,80.909 86.119,80.874 85.876,80.774 85.667,80.613 85.506,80.404 85.406,80.161 85.371,79.9 85.406,79.639 85.506,79.396 85.667,79.187 85.876,79.026 86.119,78.926 86.38,78.891 86.641,78.926 86.884,79.026 87.093,79.187 87.254,79.396 87.354,79.639 87.389,79.9
  pour cut-out: 144.608,-5 144.577,-4.686 144.486,-4.385 144.337,-4.107 144.137,-3.863 143.893,-3.663 143.615,-3.514 143.314,-3.423 143,-3.392 142.686,-3.423 142.385,-3.514 142.199,-3.613 142.107,-3.663 141.863,-3.863 141.663,-4.107 141.514,-4.385 141.423,-4.686 141.392,-5 141.423,-5.314 141.514,-5.615 141.663,-5.893 141.863,-6.137 142.107,-6.337 142.199,-6.387 142.385,-6.486 142.686,-6.577 143,-6.608 143.314,-6.577 143.615,-6.486 143.893,-6.337 144.137,-6.137 144.337,-5.893 144.486,-5.615 144.577,-5.314 144.608,-5
  pour cut-out: 11.608,-5 11.577,-4.686 11.486,-4.385 11.337,-4.107 11.137,-3.863 10.893,-3.663 10.615,-3.514 10.314,-3.423 10,-3.392 9.686,-3.423 9.385,-3.514 9.199,-3.613 9.107,-3.663 8.863,-3.863 8.663,-4.107 8.514,-4.385 8.423,-4.686 8.392,-5 8.423,-5.314 8.514,-5.615 8.663,-5.893 8.863,-6.137 9.107,-6.337 9.199,-6.387 9.385,-6.486 9.686,-6.577 10,-6.608 10.314,-6.577 10.615,-6.486 10.893,-6.337 11.137,-6.137 11.337,-5.893 11.486,-5.615 11.577,-5.314 11.608,-5
  pour cut-out: 144.608,119 144.577,119.314 144.486,119.615 144.337,119.893 144.137,120.137 143.893,120.337 143.615,120.486 143.314,120.577 143,120.608 142.686,120.577 142.385,120.486 142.199,120.387 142.107,120.337 141.863,120.137 141.663,119.893 141.514,119.615 141.423,119.314 141.392,119 141.423,118.686 141.514,118.385 141.663,118.107 141.863,117.863 142.107,117.663 142.199,117.613 142.385,117.514 142.686,117.423 143,117.392 143.314,117.423 143.615,117.514 143.893,117.663 144.137,117.863 144.337,118.107 144.486,118.385 144.577,118.686 144.608,119
  pour cut-out: 11.608,119 11.577,119.314 11.486,119.615 11.337,119.893 11.137,120.137 10.893,120.337 10.615,120.486 10.314,120.577 10,120.608 9.686,120.577 9.385,120.486 9.199,120.387 9.107,120.337 8.863,120.137 8.663,119.893 8.514,119.615 8.423,119.314 8.392,119 8.423,118.686 8.514,118.385 8.663,118.107 8.863,117.863 9.107,117.663 9.199,117.613 9.385,117.514 9.686,117.423 10,117.392 10.314,117.423 10.615,117.514 10.893,117.663 11.137,117.863 11.337,118.107 11.486,118.385 11.577,118.686 11.608,119
  pour cut-out net N407898: 39.489,79.9 39.454,80.161 39.354,80.404 39.193,80.613 38.984,80.774 38.741,80.874 38.48,80.909 38.219,80.874 37.976,80.774 37.767,80.613 37.606,80.404 37.506,80.161 37.471,79.9 37.506,79.639 37.606,79.396 37.767,79.187 37.976,79.026 38.219,78.926 38.48,78.891 38.741,78.926 38.984,79.026 39.193,79.187 39.354,79.396 39.454,79.639 39.489,79.9
  text "BOTTOM" at 20.9,-24.6 h1.5

## Silkscreen, mask and mechanical layers (free items; w line width, h text height)
OUTLINE:
  lines w0.1: 123.298,7 153,7 153,112 0,112 0,52.22 0,12 5,12 5,7 18.346,7 ; 18.346,1 ccw(c19.346,1) 19.346,0 55.056,0 ccw(c55.056,1) 56.056,1 ; 18.346,1 18.346,7 ; 18.346,1 18.346,7 ; 56.056,1 56.056,6.38 56.056,1
NCLEGEND-1-4:
  circle w0.025: c169.05,34.125 r0.2
  lines w0.025: 161.25,0 245.65,0 ; 161.25,9.75 245.65,9.75 ; 161.25,19.5 245.65,19.5 ; 161.25,29.25 245.65,29.25 ; 161.25,39 245.65,39 ; 161.25,48.75 245.65,48.75 ; 161.25,58.5 245.65,58.5 ; 161.25,68.25 245.65,68.25 ; 161.25,78 245.65,78 ; 161.25,87.75 245.65,87.75 ; 161.25,97.5 245.65,97.5 ; 161.25,107.25 245.65,107.25 ; 161.25,117 245.65,117 ; 161.25,126.75 245.65,126.75 ; 161.25,136.5 245.65,136.5 ; 161.25,140.9 245.65,140.9 ; 161.25,145.3 245.65,145.3 ; 168.9,131.625 169.2,131.625 ; 169.05,131.475 169.05,131.775 ; 176.85,-9.75 176.85,140.9 ; 210.05,-9.75 210.05,140.9 ; 232.25,-9.75 232.25,140.9 ; 161.25,-9.75 161.25,151.8 245.65,151.8 245.65,-9.75 161.25,-9.75 ; 167.05,42.375 167.05,45.375 171.05,45.375 171.05,42.375 167.05,42.375 ; 167.7,53.4 ccw(c169.05,53.4) 170.4,53.4 170.4,53.85 ccw(c169.05,53.85) 167.7,53.85 167.7,53.4 ; 167.968,92.625 168.285,91.86 169.05,91.543 169.815,91.86 170.132,92.625 169.815,93.39 169.05,93.707 168.285,93.39 167.968,92.625 ; 168.45,72.525 169.05,73.725 169.65,72.525 168.45,72.525 ; 168.475,82.875 169.05,83.45 169.625,82.875 169.05,82.3 168.475,82.875 ; 168.6,102.15 169.05,101.925 169.5,102.15 169.5,102.6 169.05,102.825 168.6,102.6 168.6,102.15 ; 168.65,112.125 168.85,111.725 169.25,111.725 169.45,112.125 169.25,112.525 168.85,112.525 168.65,112.125 ; 168.7,121.525 169.4,121.525 169.4,122.225 168.7,122.225 168.7,121.525 ; 168.862,62.25 ccw(c168.862,63.375) 168.862,64.5 169.237,64.5 ccw(c169.237,63.375) 169.237,62.25 168.862,62.25
  text "DRILL CHART: TOP to BOTTOM" at 180.57,148.5 h2.2
  text "ALL UNITS ARE IN MILLIMETERS" at 178.81,142 h2.2
  text "FIGURE" at 163.77,137.6 h2.2
  text "SIZE" at 189.93,137.6 h2.2
  text "PLATED" at 215.87,137.6 h2.2
  text "QTY" at 236.31,137.6 h2.2
  text "0.3" at 190.81,130.525 h2.2
  text "PLATED" at 215.87,130.525 h2.2
  text "546" at 236.31,130.525 h2.2
  text "0.7" at 190.81,120.775 h2.2
  text "PLATED" at 215.87,120.775 h2.2
  text "15" at 237.19,120.775 h2.2
  text "0.8" at 190.81,111.025 h2.2
  text "PLATED" at 215.87,111.025 h2.2
  text "48" at 237.19,111.025 h2.2
  text "0.9" at 190.81,101.275 h2.2
  text "PLATED" at 215.87,101.275 h2.2
  text "3" at 238.07,101.275 h2.2
  text "1.0" at 190.81,91.525 h2.2
  text "PLATED" at 215.87,91.525 h2.2
  text "21" at 237.19,91.525 h2.2
  text "1.15" at 189.93,81.775 h2.2
  text "PLATED" at 215.87,81.775 h2.2
  text "18" at 237.19,81.775 h2.2
  text "1.2" at 190.81,72.025 h2.2
  text "PLATED" at 215.87,72.025 h2.2
  text "12" at 237.19,72.025 h2.2
  text "1.5" at 190.81,62.275 h2.2
  text "PLATED" at 215.87,62.275 h2.2
  text "6" at 238.07,62.275 h2.2
  text "1.8" at 190.81,52.525 h2.2
  text "PLATED" at 215.87,52.525 h2.2
  text "12" at 237.19,52.525 h2.2
  text "4.0" at 190.81,42.775 h2.2
  text "PLATED" at 215.87,42.775 h2.2
  text "3" at 238.07,42.775 h2.2
  text "0.4" at 190.81,33.025 h2.2
  text "NON-PLATED" at 212.35,33.025 h2.2
  text "56" at 237.19,33.025 h2.2
  text "1.6" at 190.81,23.275 h2.2
  text "NON-PLATED" at 212.35,23.275 h2.2
  text "6" at 238.07,23.275 h2.2
  text "4.0" at 190.81,13.525 h2.2
  text "NON-PLATED" at 212.35,13.525 h2.2
  text "4" at 238.07,13.525 h2.2
  text "4.0" at 190.81,3.775 h2.2
  text "NON-PLATED" at 212.35,3.775 h2.2
  text "2" at 238.07,3.775 h2.2
  text "6.5" at 190.81,-5.975 h2.2
  text "NON-PLATED" at 212.35,-5.975 h2.2
  text "6" at 238.07,-5.975 h2.2
DRAWING_ORIGIN:
  lines w0.025: -0.635,0 0.635,0 ; 0,-0.635 0,0.635

## Text inside footprints (layer, text, board x,y; h text height)
BC1: PIN_NUMBER "2" at 93.75,55.55 h0.7 r180; PIN_NUMBER "1" at 95.15,55.55 h0.7 r180
BC2: PIN_NUMBER "2" at 45.95,55.9 h0.7; PIN_NUMBER "1" at 44.55,55.9 h0.7
BC3: PIN_NUMBER "2" at 96.53,44.123 h0.7 r180; PIN_NUMBER "1" at 97.93,44.123 h0.7 r180
BC4: PIN_NUMBER "2" at 94.3,26.8 h0.7 r90; PIN_NUMBER "1" at 94.3,25.4 h0.7 r90
BC5: PIN_NUMBER "2" at 108.53,44.123 h0.7 r180; PIN_NUMBER "1" at 109.93,44.123 h0.7 r180
BC6: PIN_NUMBER "2" at 102.53,44.123 h0.7 r180; PIN_NUMBER "1" at 103.93,44.123 h0.7 r180
BC7: PIN_NUMBER "2" at 120.53,44.123 h0.7 r180; PIN_NUMBER "1" at 121.93,44.123 h0.7 r180
BC8: PIN_NUMBER "2" at 114.53,44.123 h0.7 r180; PIN_NUMBER "1" at 115.93,44.123 h0.7 r180
BC9: PIN_NUMBER "2" at 132.115,45.942 h0.7 r180; PIN_NUMBER "1" at 133.515,45.942 h0.7 r180
BC10: PIN_NUMBER "2" at 126.53,44.123 h0.7 r180; PIN_NUMBER "1" at 127.93,44.123 h0.7 r180
BC11: PIN_NUMBER "2" at 47.2,24.1 h0.7 r180; PIN_NUMBER "1" at 48.6,24.1 h0.7 r180
BC12: PIN_NUMBER "2" at 86.215,45.929 h0.7 r180; PIN_NUMBER "1" at 87.615,45.929 h0.7 r180
BC13: PIN_NUMBER "2" at 50.63,44.109 h0.7 r180; PIN_NUMBER "1" at 52.03,44.109 h0.7 r180
BC14: PIN_NUMBER "2" at 68.63,44.109 h0.7 r180; PIN_NUMBER "1" at 70.03,44.109 h0.7 r180
BC15: PIN_NUMBER "2" at 80.63,44.109 h0.7 r180; PIN_NUMBER "1" at 82.03,44.109 h0.7 r180
BC16: PIN_NUMBER "2" at 62.63,44.109 h0.7 r180; PIN_NUMBER "1" at 64.03,44.109 h0.7 r180
BC17: PIN_NUMBER "2" at 74.63,44.109 h0.7 r180; PIN_NUMBER "1" at 76.03,44.109 h0.7 r180
BC18: PIN_NUMBER "2" at 56.63,44.109 h0.7 r180; PIN_NUMBER "1" at 58.03,44.109 h0.7 r180
BC19: PIN_NUMBER "2" at 5.7,17.625 h0.7; PIN_NUMBER "1" at 4.3,17.625 h0.7
BC20: PIN_NUMBER "1" at 23.63,44.1 h0.7 r180; PIN_NUMBER "2" at 22.23,44.1 h0.7 r180
BC21: PIN_NUMBER "1" at 41.215,45.915 h0.7 r180; PIN_NUMBER "2" at 39.815,45.915 h0.7 r180
BC22: PIN_NUMBER "1" at 17.63,44.1 h0.7 r180; PIN_NUMBER "2" at 16.23,44.1 h0.7 r180
BC23: PIN_NUMBER "1" at 5.63,44.1 h0.7 r180; PIN_NUMBER "2" at 4.23,44.1 h0.7 r180
BC24: PIN_NUMBER "1" at 35.63,44.1 h0.7 r180; PIN_NUMBER "2" at 34.23,44.1 h0.7 r180
BC25: PIN_NUMBER "1" at 29.63,44.1 h0.7 r180; PIN_NUMBER "2" at 28.23,44.1 h0.7 r180
BC26: PIN_NUMBER "1" at 11.63,44.1 h0.7 r180; PIN_NUMBER "2" at 10.23,44.1 h0.7 r180
C1: PIN_NUMBER "2" at 94.3,21 h0.7 r270; PIN_NUMBER "1" at 94.3,22.8 h0.7 r270
C2: PIN_NUMBER "1" at 118.9,55.9 h0.7; PIN_NUMBER "2" at 120.7,55.9 h0.7
C3: PIN_NUMBER "1" at 111.8,55.9 h0.7; PIN_NUMBER "2" at 113.6,55.9 h0.7
C4: PIN_NUMBER "1" at 104.7,55.9 h0.7; PIN_NUMBER "2" at 106.5,55.9 h0.7
C5: PIN_NUMBER "1" at 119.4,21.6 h0.7 r180; PIN_NUMBER "2" at 117.6,21.6 h0.7 r180
C6: PIN_NUMBER "1" at 116.6,17.4 h0.7; PIN_NUMBER "2" at 118.4,17.4 h0.7
C7: PIN_NUMBER "1" at 127.68,48.15 h0.7 r270; PIN_NUMBER "2" at 127.68,46.35 h0.7 r270
C8: PIN_NUMBER "1" at 124.3,53.3 h0.7; PIN_NUMBER "2" at 126.1,53.3 h0.7
C9: PIN_NUMBER "1" at 124.3,55.7 h0.7; PIN_NUMBER "2" at 126.1,55.7 h0.7
C10: PIN_NUMBER "1" at 131.7,53.6 h0.7 r180; PIN_NUMBER "2" at 129.9,53.6 h0.7 r180
C11: PIN_NUMBER "2" at 145.9,72.9 h0.7 r270; PIN_NUMBER "1" at 145.9,74.7 h0.7 r270
C12: PIN_NUMBER "2" at 145.9,76.5 h0.7 r270; PIN_NUMBER "1" at 145.9,78.3 h0.7 r270
C13: PIN_NUMBER "2" at 46.8,22 h0.7 r180; PIN_NUMBER "1" at 48.6,22 h0.7 r180
C14: PIN_NUMBER "1" at 71,55.9 h0.7; PIN_NUMBER "2" at 72.8,55.9 h0.7
C15: PIN_NUMBER "1" at 63.9,55.9 h0.7; PIN_NUMBER "2" at 65.7,55.9 h0.7
C16: PIN_NUMBER "1" at 56.8,55.9 h0.7; PIN_NUMBER "2" at 58.6,55.9 h0.7
C17: PIN_NUMBER "1" at 72.35,16.936 h0.7; PIN_NUMBER "2" at 74.15,16.936 h0.7
C18: PIN_NUMBER "1" at 73.5,21.336 h0.7 r180; PIN_NUMBER "2" at 71.7,21.336 h0.7 r180
C19: PIN_NUMBER "1" at 79.5,48.15 h0.7 r270; PIN_NUMBER "2" at 79.5,46.35 h0.7 r270
C20: PIN_NUMBER "1" at 76.4,55.7 h0.7; PIN_NUMBER "2" at 78.2,55.7 h0.7
C21: PIN_NUMBER "1" at 76.4,53.3 h0.7; PIN_NUMBER "2" at 78.2,53.3 h0.7
C22: PIN_NUMBER "2" at 82,53.6 h0.7 r180; PIN_NUMBER "1" at 83.8,53.6 h0.7 r180
C23: PIN_NUMBER "2" at 96.2,73.45 h0.7 r270; PIN_NUMBER "1" at 96.2,75.25 h0.7 r270
C24: PIN_NUMBER "2" at 96.2,77.05 h0.7 r270; PIN_NUMBER "1" at 96.2,78.85 h0.7 r270
C25: PIN_NUMBER "2" at 5.8,15.725 h0.7; PIN_NUMBER "1" at 4,15.725 h0.7
C26: PIN_NUMBER "1" at 23.1,55.9 h0.7; PIN_NUMBER "2" at 24.9,55.9 h0.7